# Altium PCB rodin_24V_step.PcbDoc
Units mm, origin at the board's own origin, x right, y up, seen from the top; angles counter-clockwise.
Board outline 55 x 55 mm, 2 copper layers (Top Layer, Bottom Layer); 48 components, 46 nets, 215 pads, 13 vias.
Unrouted connection lines stored in the file: 117.
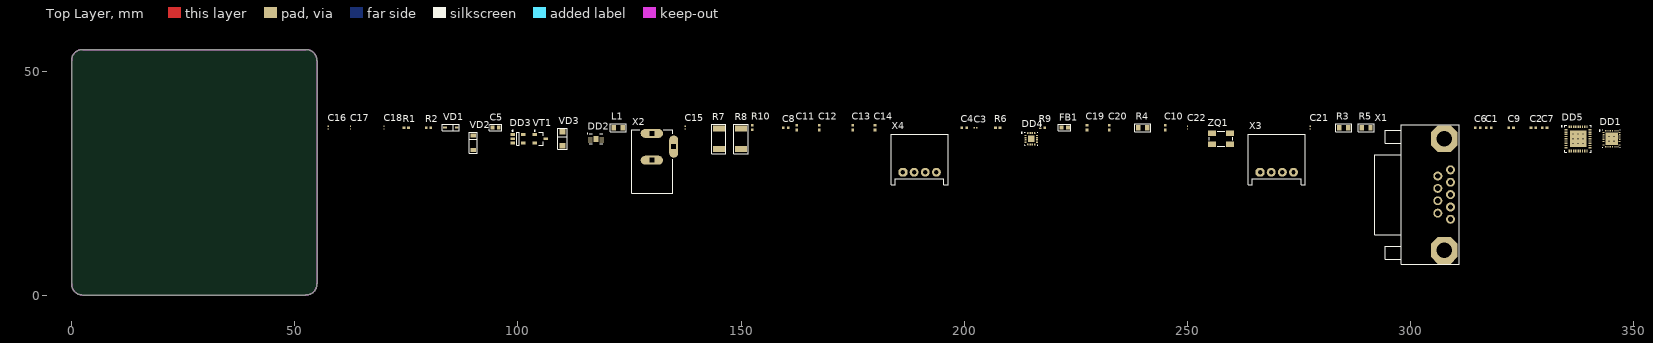
[diagram p0: Top Layer view]
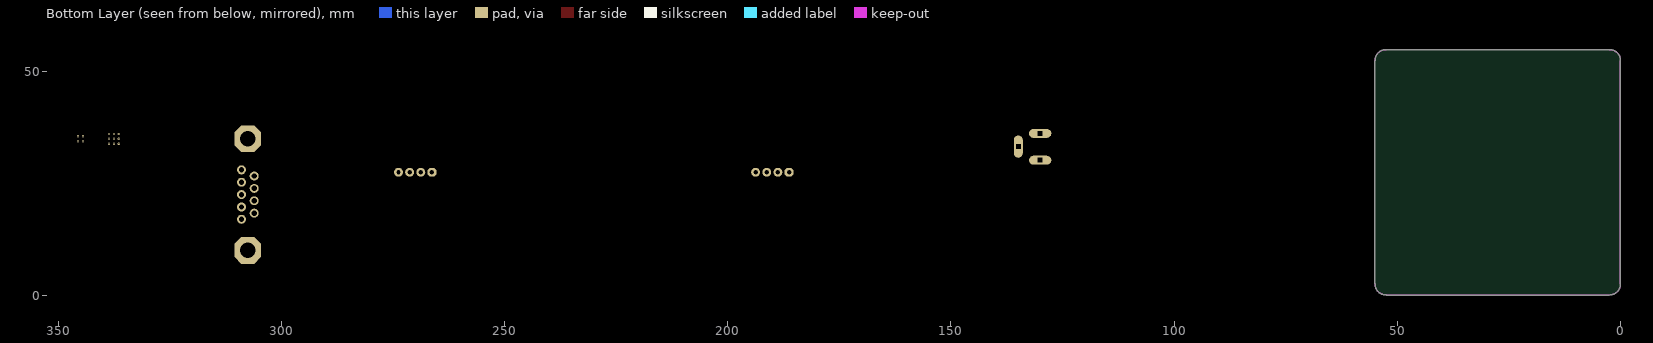
[diagram p1: Bottom Layer view, seen from below]

## Layer stack, top to bottom
Top Solder: solder mask 0.0102, Solder Resist, Dk 3.5
Top Layer: signal copper 0.0356
Dielectric 1: dielectric 0.32, FR-4, Dk 4.8
Bottom Layer: signal copper 0.0356
Bottom Solder: solder mask 0.0102, Solder Resist, Dk 3.5

## Board outline
2.499,0 cw(c2.499,2.492) 0.007,2.492 0,2.5 0,52.5 0,52.501 cw(c2.492,52.501) 2.492,54.993 2.5,55 52.5,55 52.5,54.992 cw(c52.5,52.5) 54.992,52.5 55,52.5 55,2.5 54.992,2.5 cw(c52.5,2.5) 52.5,0.008 52.5,0

## Design rules (kind name [scope] priority, off if disabled: settings)
Clearance [All] p1: gap=0.254 ignorepadtopadclearanceinfootprint=FALSE except(0: Arc-Hole Track-Hole SMDPad-Hole THPad-Hole Via-Hole Fill-Hole Poly-Hole Region-Hole Text-Hole)
PolygonConnect [All] p1: connectstyle=Relief reliefconductorwidth=0.254 reliefentries=4 polygonreliefangle="90 Angle" airgapwidth=0.254
RoutingVias [All] p1: holewidth=0.711 width=1.27 viastyle="Through Hole" minholewidth=0.711 minwidth=1.27 maxholewidth=0.711 maxwidth=1.27
SolderMaskExpansion [All] p1: expansion=0.102
Width [All] p1: maxlimit=1 minlimit=0.25 preferedwidth=0.3
30 further rules are at their usual default settings.

## Components (designator, comment, footprint, x,y, rotation, side; value= is the part's Value field where it differs from the comment)
C1 "Capacitor" CH0402C 317.5,37.5 r0 top
C2 "Capacitor" CH0402C 327.5,37.5 r0 top
C3 "Capacitor" CH0201C 202.5,37.5 r0 top
C4 "Capacitor" CH0402C 200,37.5 r0 top
C5 "Capacitor" CH0603C 95,37.5 r0 top
C6 "Capacitor" CH0402C 315,37.5 r0 top
C7 "Capacitor" CH0402C 330,37.5 r0 top
C8 "Capacitor" CH0402C 160,37.5 r0 top
C9 "Capacitor" CH0402C 322.5,37.5 r0 top
C10 "Capacitor" CH0402C 245,37.5 r90 top
C11 "Capacitor" CH0402C 162.5,37.5 r90 top
C12 "Capacitor" CH0402C 167.5,37.5 r90 top
C13 "Capacitor" CH0402C 175,37.5 r90 top
C14 "Capacitor" CH0402C 180,37.5 r90 top
C15 "Capacitor" CH0201C 137.5,37.5 r90 top
C16 "Capacitor" CH0201C 57.5,37.5 r90 top
C17 "Capacitor" CH0201C 62.5,37.5 r90 top
C18 "Capacitor" CH0201C 70,37.5 r90 top
C19 "Capacitor" CH0402C 227.5,37.5 r90 top
C20 "Capacitor" CH0402C 232.5,37.5 r90 top
C21 "Capacitor" CH0201C 277.5,37.5 r90 top
C22 "Capacitor" CH0201C 250,37.5 r90 top
DD1 "TRS3253E-EP" TRS3253E-EP 345,35 r0 top
DD2 "LT3653" LT3653 117.5,35 r0 top
DD3 "TLV755P" SOT23-5 100,35 r0 top
DD4 "DRV8847" DRV8847 215,35 r0 top
DD5 "STM32F103TB" STM32_f103_36Pins 337.5,35 r0 top
FB1 "Ferrite bead" CH0603L 222.5,37.5 r0 top
L1 "Inductor" CH0805L 122.5,37.5 r0 top
R1 "Res_0.125" CH0402R 75,37.5 r0 top
R2 "Res_0.125" CH0402R 80,37.5 r0 top
R3 "Res_0.125" CH0805R 285,37.5 r0 top
R4 "Res_0.125" CH0805R 240,37.5 r0 top
R5 "Res_0.125" CH0805R 290,37.5 r0 top
R6 "Res_0.125" CH0402R 207.5,37.5 r0 top
R7 "Res_1" CH2010R 145,35 r90 top
R8 "Res_1" CH2010R 150,35 r90 top
R9 "Res_0.125" CH0402R 217.5,37.5 r0 top
R10 "Res_0.125" CH0402R 152.5,37.5 r90 top
VD1 "TVS-diod_simmetrical" SOD323 85,37.5 r0 top
VD2 "Diod Zener" SOD123 90,32.5 r90 top
VD3 "TVS-diod_directed" SOD123W 110,35 r90 top
VT1 "P-Channel" SOT23_132 105,35 r0 top
X1 "DB-9" "CON: DB-9F" 307.5,22.5 r0 top
X2 "Input" "CON: 163-179PH-EX" 130,22.5 r90 top
X3 "4_pins" "CON: CWF-4R" 270,27.5 r0 top
X4 "STEPPER MOTOR" "CON: CWF-4R" 190,27.5 r0 top
ZQ1 "Oscillator" "OSC: 5032" 257.5,35 r0 top

## Footprints (in the part's own frame and the unit in brackets; to place one, negate y for a bottom-side part, rotate by r counter-clockwise, add the part's x,y. Pads: shape width x height; smd on the part's side, far side on the other; paste and mask are expansions set on the pad)
CH0201C [mm]
  rect 0.3x0.3 smd: 1(-0.3,0) 2(0.3,0)
  body extent -0.3,-0.15 0.3,0.15, height 0.31
CH0402C [mm]
  rect 0.6x0.6 smd: 1(-0.55,0) 2(0.55,0)
  body extent -0.51,-0.25 0.51,0.25, height 0.51
CH0402R [mm]
  rect 0.6x0.6 smd: 1(-0.5,0) 2(0.5,0)
  body extent -0.52,-0.25 0.47,0.25, height 0.34
CH0603C [mm] "Chip Capacitor, 2-Leads, Body 1,53x0,85mm, IPC Medium Density"
  rect 0.85x0.85 smd: 1(-0.7,0) 2(0.7,0)
  silkscreen extent -1.4,-0.7 1.4,0.7, body extent -0.8,-0.4 0.8,0.4, height 0.3
CH0603L [mm]
  rect 0.85x0.85 smd: 1(-0.7,0) 2(0.7,0)
  silkscreen extent -1.4,-0.7 1.4,0.7, body extent -0.8,-0.4 0.8,0.4, height 0.8
CH0805L [mm]
  rect 1x1.25 smd: 1(-1,0) 2(1,0)
  silkscreen extent -1.8,-0.9 1.8,0.9, body extent -1,-0.62 1,0.63, height 0.85
CH0805R [mm]
  rect 1x1.25 smd: 1(-1,0) 2(1,0)
  silkscreen extent -1.8,-0.9 1.8,0.9, body extent -1,-0.6 1,0.6, height 0.44
CH2010R [mm]
  rect 1.4x2.7 smd: 1(-2.3,0) 2(2.3,0)
  silkscreen extent -3.3,-1.6 3.3,1.6, body extent -2.5,-1.25 2.5,1.25, height 0.6
"CON: 163-179PH-EX" [mm]
  oval 2x5 hole 1 square: 1(13.7,0) 2(7.7,0)
  oval 5x2 hole 1 square: 2(10.75,-4.9)
  round 0.5 on Mech1: ""(14,-3)
  silkscreen extent 0.3,-4.72 14.5,4.5, body extent 0,-5 14.4,4.4, height 11.05
"CON: CWF-4R" [mm]
  oct 2x2 hole 1: 1(-3.75,0)
  round 2 hole 1: 2(-1.25,0) 3(1.25,0) 4(3.75,0)
  round 0.5 on Mech1: ""(-5.6,-2.2)
  round 0.5 on Top Overlay: ""(-5,-1)
  silkscreen extent -6.38,-2.8 6.35,8.5, body extent -6.25,-2.7 6.25,8.8, height 5.75
"CON: DB-9F" [mm]
  round 2 hole 1.2: 1(1.42,-5.54) 2(1.42,-2.77) 3(1.42,0) 4(1.42,2.77) 5(1.42,5.54) 6(-1.42,-4.155) 7(-1.42,-1.385) 8(-1.42,1.385) 9(-1.42,4.155)
  oct 6x6 hole 3.5: G1(0,12.5) G2(0,-12.5)
  silkscreen extent -15.58,-15.62 3.32,15.62, body extent -15.3,-15.4 3,15.41, height 12.52
DRV8847 [mm] "PQFN127P600-8N"
  oval 0.5x0.3 smd: 1(-1.275,0.75) 2(-1.275,0.25) 3(-1.275,-0.25) 4(-1.275,-0.75) 9(1.275,-0.75) 10(1.275,-0.25) 11(1.275,0.25) 12(1.275,0.75)
  oval 0.3x0.5 smd: 5(-0.75,-1.275) 6(-0.25,-1.275) 7(0.25,-1.275) 8(0.75,-1.275) 13(0.75,1.275) 14(0.25,1.275) 15(-0.25,1.275) 16(-0.75,1.275)
  rect 1.5x1.5 smd: 17(0,0)
  silkscreen extent -2.27,-1.5 1.5,1.5, body extent -1.5,-1.5 1.5,1.5, height 0.75
LT3653 [mm] "SON, 8-Leads, Body 2,00x3,00mm, Pitch 0,45mm, Thermal Pad 1,35x1,12mm, IPC Medium Density"
  rect 1x0.2 smd: 1(-1.31,0.675) 2(-1.31,0.225) 3(-1.31,-0.225) 4(-1.31,-0.675) 5(1.31,-0.675) 6(1.31,-0.225) 7(1.31,0.225) 8(1.31,0.675)
  rect 1.12x1.35 smd: 9(0,0)
  silkscreen extent -1.95,-1.15 1.5,1.2, body extent -1.55,-1 1.55,1, height 0.8
"OSC: 5032" [mm]
  round 0.5 on Top Overlay: 1(-2.6,-2.2)
  rect 1.8x1.2 smd: 1(-2,-1.2) 2(2,-1.2) 3(2,1.2) 4(-2,1.2)
  round 0.5 on Mech1: ""(-2,-1.1)
  silkscreen extent -2.6,-1.7 2.6,1.7, body extent -2.5,-1.59 2.5,1.59, height 1.1
SOD123 [mm]
  rect 0.91x1.22 smd: 1(0,0) 2(3.275,0)
  round 0.5 on Mech1: 4(3,0.4)
  silkscreen extent -0.7,-0.9 4,0.9, body extent -0.25,-0.8 3.45,0.8, height 1.25
SOD123W [mm]
  rect 1.2x1.4 smd: 1(-1.55,0) 2(1.55,0)
  silkscreen extent -2.4,-1.05 2.4,1.05, body extent -2,-0.95 2,0.95, height 1.1
SOD323 [mm]
  rect 0.85x0.5 smd: 1(-1.3,0) 2(1.3,0)
  round 0.5 on Mech1: 5(0.7,0.2)
  silkscreen extent -1.9,-0.7 1.9,0.7, body extent -1.15,-0.6 1.15,0.6, height 1.04
SOT23-5 [mm] "SOT23, 5-Leads, Body 2,90x2,80mm, Pitch 0,95mm, IPC Medium Density"
  rect 1x0.6 smd: 1(-1.2,0.95) 2(-1.2,0) 3(-1.2,-0.95) 4(1.2,-0.95) 5(1.2,0.95)
  round 0.5 on Mech1: ""(-1.1,1.1)
  silkscreen extent -1.32,-1.5 0.25,1.92, body extent -1.5,-1.5 1.5,1.5, height 1.3
SOT23_132 [mm] "SOT23, 3-Leads, Body 3,0x2,6mm (max), Pitch 0,95mm, IPC Medium Density"
  rect 1x0.6 smd: 1(-1.2,0.95) 2(-1.2,-0.95) 3(1.2,0)
  round 0.5 on Mech1: ""(-0.9,1.1)
  silkscreen extent -1.32,-1.5 0.7,1.92, body extent -1.32,-1.52 1.32,1.52, height 1.12
STM32_f103_36Pins [mm] "PQFN127P600-8N"
  rect 0.65x0.3 smd: 1(-2.7,2) 2(-2.7,1.5) 3(-2.7,1) 4(-2.7,0.5) 5(-2.7,0) 6(-2.7,-0.5) 7(-2.7,-1) 8(-2.7,-1.5) 9(-2.7,-2) 19(2.7,-2) 20(2.7,-1.5) 21(2.7,-1) 22(2.7,-0.5) 23(2.7,0) 24(2.7,0.5) 25(2.7,1) 26(2.7,1.5) 27(2.7,2)
  rect 0.3x0.65 smd: 10(-2,-2.7) 11(-1.5,-2.7) 12(-1,-2.7) 13(-0.5,-2.7) 14(0,-2.7) 15(0.5,-2.7) 16(1,-2.7) 17(1.5,-2.7) 18(2,-2.7) 28(2,2.7) 29(1.5,2.7) 30(1,2.7) 31(0.5,2.7) 32(0,2.7) 33(-0.5,2.7) 34(-1,2.7) 35(-1.5,2.7) 36(-2,2.7)
  rect 3.7x3.7 smd: 37(0,0)
  silkscreen extent -3.77,-3 3,3, body extent -3,-3 3,3, height 0.9
TRS3253E-EP [mm] "PQFN, 32-Leads, Body 4,00x4,00mm, Pitch 0,40mm, Thermal Pad 2,80x2,80mm, IPC Medium Density"
  oval 0.4x0.2 smd: 1(-1.8,1.4) 2(-1.8,1) 3(-1.8,0.6) 4(-1.8,0.2) 5(-1.8,-0.2) 6(-1.8,-0.6) 7(-1.8,-1) 8(-1.8,-1.4) 17(1.8,-1.4) 18(1.8,-1) 19(1.8,-0.6) 20(1.8,-0.2) 21(1.8,0.2) 22(1.8,0.6) 23(1.8,1) 24(1.8,1.4)
  oval 0.2x0.4 smd: 9(-1.4,-1.8) 10(-1,-1.8) 11(-0.6,-1.8) 12(-0.2,-1.8) 13(0.2,-1.8) 14(0.6,-1.8) 15(1,-1.8) 16(1.4,-1.8) 25(1.4,1.8) 26(1,1.8) 27(0.6,1.8) 28(0.2,1.8) 29(-0.2,1.8) 30(-0.6,1.8) 31(-1,1.8) 32(-1.4,1.8)
  rect 2.8x2.8 smd: 33(0,0)
  silkscreen extent -2.77,-2 2,2, body extent -2,-2 2,2, height 0.9

## Part data
C1 C2 C6 C7 C9 C10 C11 C12 C13 C14 C19: Capacitance=0,1мк, Case=0402, Manufacture=AVX, Voltage=10В, HelpURL=https://ru.mouser.com/ProductDetail/AVX/0402ZD103KAT2A?qs=sGAEpiMZZMs0AnBnWHyRQKdiqyDPVQdAu74W%2fwwRq8A%3d, Model=0402ZD103KAT2A
C3 C15 C16 C17 C18: Capacitance=1мк, Case=0201, Manufacture="Murata Electronics", Voltage=10В, HelpURL=https://ru.mouser.com/ProductDetail/Murata-Electronics/GRM033C81A105ME05E?qs=sGAEpiMZZMs0AnBnWHyRQN7%2fAA2D2lPPXfhIkJ3ChWM%252bNp28BKy3Ug%3d%3d, Model=GRM033C81A105ME05E
C4: Capacitance=0,01мк, Case=0402, Manufacture=Yageo, Voltage=10В, HelpURL=https://ru.mouser.com/ProductDetail/Yageo/CC0402MRX7R6BB103?qs=sGAEpiMZZMs0AnBnWHyRQCF1lTWZ1EBLC11KxQK9NtY%3D, Model=CC0402MRX7R6BB103
C5: Capacitance=4,7мк, Case=0603, Manufacture=TDK, Voltage=35В, HelpURL=https://ru.mouser.com/ProductDetail/TDK/C1608JB1V475M080AC?qs=sGAEpiMZZMs0AnBnWHyRQFv7x1xn%252bYFd6VAPnwlpyGEmZrVGUJGxTQ%3d%3d, Model=C1608JB1V475M080AC
C8: Capacitance=4,7мк, Case=0402, Manufacture="Murata Electronics", Voltage=10В, HelpURL=https://ru.mouser.com/ProductDetail/Murata-Electronics/ZRB15XR61A475KE01D?qs=sGAEpiMZZMs0AnBnWHyRQO9VYadaKTO%252beZnE9zFUsbv4FmCibz4ZfQ%3d%3d, Model=ZRB15XR61A475KE01D
C20: Capacitance=10мк, Case=0402, Manufacture=Yageo, Voltage=10В, HelpURL=https://ru.mouser.com/ProductDetail/Yageo/CC0402MRX5R6BB106?qs=sGAEpiMZZMsh%252B1woXyUXj67dvM3QAimZTx2LImfM178%3D, Model=CC0402MRX5R6BB106
C21 C22: Capacitance=30, Case=0201, Manufacture=KEMET, Voltage=10В, HelpURL=https://ru.mouser.com/ProductDetail/KEMET/CBR02C308B8GAC?qs=sGAEpiMZZMs0AnBnWHyRQKJCfzG%2fi9wHnix1yOwfSPhOUzhoHh%252bTpQ%3d%3d, Model=CBR02C308B8GAC
DD1: "UART - RS232", Case=PQFN-32, Manufacture="Texas Instruments", HelpURL=http://www.ti.com/product/trs3253e-ep, Model=TRS3253E-EP
DD2: "7.5~30 to 5", Model=LT3653
DD3: library part "LDO +3.3V", Case=SOT-23, Manufacture="Texas Instruments", HelpURL=http://www.ti.com/product/TLV755P?keyMatch=TLV755P&tisearch=Search-EN-Everything, Model=TLV755P
DD4: Case=TSSOP, Manufacture="Texas Instruments", HelpURL=http://www.ti.com/product/DRV8847, Model=DRV8847
DD5: "Микроконтроллер", Name=STM32F103TB
FB1: Case=0603, Manufacture=murata, Max current=2A, HelpURL=https://www.murata.com/en-us/products/productdetail?partno=BLM18PG121SN1%23, Impedance=120, Model=BLM18PG121SN1#
L1: Case=0805, Inductance=4,7мк, Manufacture=Panasonic, Max current=1А, HelpURL=https://ru.mouser.com/ProductDetail/Panasonic/ELG-TEA4R7NA?qs=sGAEpiMZZMsg%252by3WlYCkU%252bdHxGw%252bjF29VUqcX1cNOgM%3d, Impedance=300м, Model=ELG-TEA4R7NA
R1 R2 R6 R9 R10: Case=0402, Manufacture=Yageo, HelpURL=https://ru.mouser.com/ProductDetail/Yageo/AC0402FR-7W10KL?qs=sGAEpiMZZMvdGkrng054txbN%2f5LBcxld3gyqgmBuiXRPLjwmdNqO3A%3d%3d, Impedance=10К, Model=AC0402FR-7W10KL
R3 R4 R5: Case=0805, Manufacture="Panasonic Industrial Devices", HelpURL=https://ru.mouser.com/ProductDetail/Panasonic-Industrial-Devices/ERJ-6ENF9091V?qs=sGAEpiMZZMvdGkrng054tx7%2f6%252bNA3LAJZkxjwUnWjWM%3d, Impedance=10К, Model=ERJ-6ENF9091V
R7 R8: Case=2010, Manufacture="Vishay Dale", Power=1Вт, HelpURL=https://www.digikey.com/product-detail/en/CRCW20101K69FKEF/541-1.69KACCT-ND/1179159?WT.z_cid=ref_netcomponents_dkc_buynow&utm_source=netcomponents&utm_medium=aggregator&utm_campaign=buynow, Impedance=0,8, Model=CRCW20101K69FKEF
VD1: Case=SOD-323P, Manufacturer="Torex Semiconductor", Thresh_Voltage=24В, HelpURL=https://ru.mouser.com/Semiconductors/Discrete-Semiconductors/Diodes-Rectifiers/TVS-Diodes-ESD-Suppressors/_/N-azknd?P=1z0z7ymZ1yzv44xZ1y95zfoZ1z0x69g&Ns=Package+%2f+Case%7c0, Model=XBP1012-G
VD3: Case=SOD-123W, Clamping_Voltage=8В, Manufacturer=Nexperia, HelpURL=https://ru.mouser.com/ProductDetail/Nexperia/PTVS3V3S1UTR115?qs=sGAEpiMZZMsItbzKdwyIe55sLWjhUV0FnMtsDZGUovc%3d, Model=PTVS3V3S1UTR,115
VT1: Manufacture="Diodes Incorporated", HelpURL=https://ru.mouser.com/ProductDetail/Diodes-Incorporated/DMP4065S-7?qs=sGAEpiMZZMshyDBzk1%2fWizUdW5KNcF83uXTduzoNpXIy82%252bBOlvohQ%3d%3d, Id=3,4А, Model=DMP4065S-7, Vgs=1В, Vsd=40В
X1: library part 9_pins, 1=DCD, 2=RXD, 3=TXD, 4=DTR, 5=GND, 6=DSR, 7=RTS, 8=CTS, 9=RI, Case=DB-9, HelpURL=https://www.digikey.com/product-detail/en/assmann-wsw-components/A-DS-09-LL-Z/AE10972-ND/1241781, Model=DB-9
X2: library part 2_pins, HelpURL=https://ru.farnell.com/gct-global-connector-technology/dcj250-10-a-k1-k/dc-power-jack-5a-20vdc-black/dp/2524130?st=power%20jack, Vcc=+24В
X3: Manufacture="Omron Electronics", 1=SWCLK, 2=SWDIO, 3=BOOT0, 4=NRST, HelpURL=https://ru.mouser.com/ProductDetail/Omron-Electronics/XN2D-4471?qs=sGAEpiMZZMvd2mIcYG7oaC0TeQEBnk0JvHtcE4UuDS0%3D, Model=XN2D-4471
X4: library part 4_pins, "Bipolar Stepper Motor 200 Step 0.35A 12VDC", Case=20x20x28mm, Manufacture=stepperonline, ManufactureConnector="Omron Electronics", 1=A, 2=C, 3=B, 4=D, HelpURL=https://www.omc-stepperonline.com/nema-8-stepper-motor/nema-8-bipolar-18deg-16ncm-23ozin-02a-48v-20x20x28mm-4-wires-8hs11-0204s.html, HelpURLConnector=https://ru.mouser.com/ProductDetail/Omron-Electronics/XN2D-4471?qs=sGAEpiMZZMvd2mIcYG7oaC0TeQEBnk0JvHtcE4UuDS0%3D, Model=8HS11-0204S, ModelConnector=XN2D-4471
ZQ1: Case=5x3,2mm, Freq=8МГц, Manufacture="CTS Electronic Components", HelpURL=https://ru.mouser.com/ProductDetail/CTS-Electronic-Components/636L3C008M00000?qs=sGAEpiMZZMt8zWNA7msRCjl4WCD9T6KEFNudNQm%252BeAU%3D, Model=636L3C008M00000

## Via types
v1: diameter 0.5, hole 0.2, Top Layer to Bottom Layer, 13 vias

## Nets (pads, with @x,y where several pads share a name; then routed paths per layer and width w, separated by ;. In a path a pad name is that pad's centre, name@x,y a point inside that pad or via, vN(x,y) a via of type N, cw(c..) or ccw(c..) an arc to the next point about the centre after c; other vN are vias at no path point)
+5В: C16.1 C17.1 DD2.5 DD3.1
+12В: C19.1 C20.1 DD4.12
+24В: C5.1 DD2.1 VD2.2 VT1.3
BOOTO: C10.1 DD5.35 X3.3
DOUT2: DD1.23 DD5.34
DOUT3: DD1.22 DD5.32
GND: C1.1 C3.1 C4.2 C5.2 C6.2 C8.1 C9.2 C10.2 C11.2 C12.2 C13.2 C14.2 C16.2 C17.2 C18.2 C19.2 C20.2 C21.2 C22.2 DD1.26 DD2.9 DD3.2 DD4.13 DD5.5 DD5.18 DD5.26 DD5.36 R1.1 R2.1 R4.1 R6.1 R7.1 R8.1 R10.2 VD1.1 VD2.1 VD3.1 X1.5 X2.2
IN1: DD4.16 DD5.7
IN2: DD4.15 DD5.8
IN3: DD4.9 DD5.9
IN4: DD4.10 DD5.10
NetC2_1: C2.1 DD1.1
NetC2_2: C2.2 DD1.2
NetC6_1: C6.1 DD1.3
NetC7_1: C7.1 DD1.29
NetC7_2: C7.2 DD1.31
NetC9_1: C9.1 DD1.30
NetC15_1: C15.1 DD2.7
NetC15_2: C15.2 DD2.8 L1.1 VD3.2
NetDD1_5: DD1.5 X1.3
NetDD1_7: DD1.7 X1.7
NetDD1_13: DD1.13 X1.8
NetDD1_14: DD1.14 X1.2
NetDD2_4: DD2.4 R2.2
NetDD2_6: DD2.6 L1.2
NetDD4_2: DD4.2 X4.1
NetDD4_3: DD4.3 R7.2
NetDD4_4: DD4.4 X4.2
NetDD4_5: DD4.5 X4.3
NetDD4_6: DD4.6 R8.2
NetDD4_7: DD4.7 X4.4
NetDD4_14: DD4.14 R6.2
NetR1_2: R1.2 VT1.1
NetVD1_2: VD1.2 VT1.2 X2.1
nFAULT: DD4.8 DD5.11 R9.2
NRST: DD5.4 R3.2 X3.4
nSLEEP: DD4.1 DD5.12
OSC_IN: C21.1 DD5.2 ZQ1.1@255.5,33.8
OSC_OUT: C22.1 DD5.3 ZQ1.3
RIN1: DD1.21 DD5.33
RIN2: DD1.20 DD5.31
SWCLK: DD5.28 R4.2 X3.1
SWDIO: DD5.25 R5.1 X3.2
TRQ: DD4.11 DD5.13 R10.1
VCC: C1.2 C3.2 C4.1 C8.2 C11.1 C12.1 C13.1 C14.1 C18.1 DD1.15 DD1.27 DD3.5 DD5.1 DD5.19 DD5.27 FB1.1 R3.1 R5.2 R9.1
VCC_A: DD5.6 FB1.2
pads on no net: DD1.4 DD1.6 DD1.8 DD1.9 DD1.10 DD1.11 DD1.12 DD1.16 DD1.17 DD1.18 DD1.19 DD1.24 DD1.25 DD1.28 DD1.32 DD1.33 DD2.2 DD2.3 DD3. DD3.3 DD3.4 DD4.17 DD5.14 DD5.15 DD5.16 DD5.17 DD5.20 DD5.21 DD5.22 DD5.23 DD5.24 DD5.29 DD5.30 DD5.37 VD1.5 VD2.4 VT1. X1.1 X1.4 X1.6 X1.9 X1.G1 X1.G2 X2. X3. X4. ZQ1. ZQ1.1@254.9,32.8 ZQ1.2 ZQ1.4
copper on no net:
  other v1: 336.4,33.9 337.5,33.9 338.6,33.9 344.45,34.45 345.55,34.45 336.4,35 337.5,35 338.6,35 344.45,35.55 345.55,35.55 336.4,36.1 337.5,36.1 338.6,36.1

## Keep-outs
Keep-Out Layer:
  lines w0.2: 0,2.5 0,52.5 ; 0,52.501 cw(c2.492,52.501) 2.492,54.993 ; 0.007,2.492 ccw(c2.499,2.492) 2.499,0 ; 2.5,0 52.5,0 ; 2.5,55 52.5,55 ; 52.5,0.008 ccw(c52.5,2.5) 54.992,2.5 ; 52.5,54.992 cw(c52.5,52.5) 54.992,52.5 ; 55,2.5 55,52.5